# EAGLE board timer (EAGLE 6.5.0)
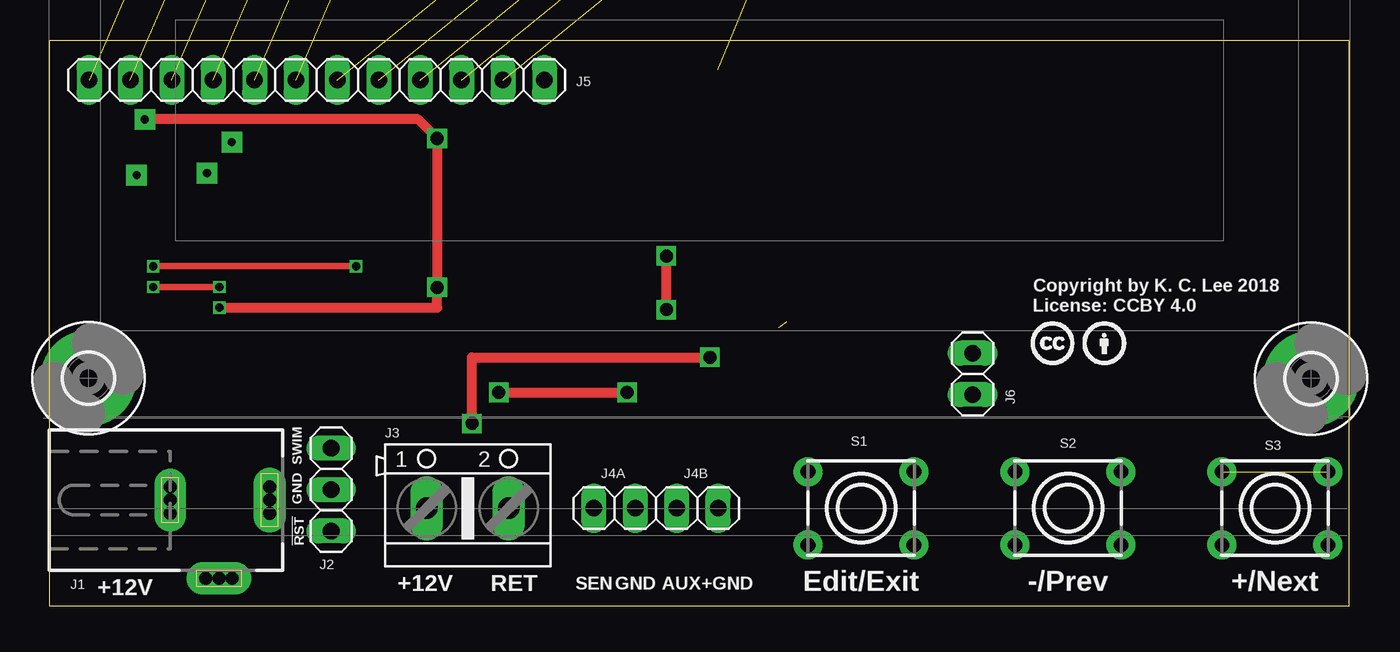
[diagram p0: board, top side]
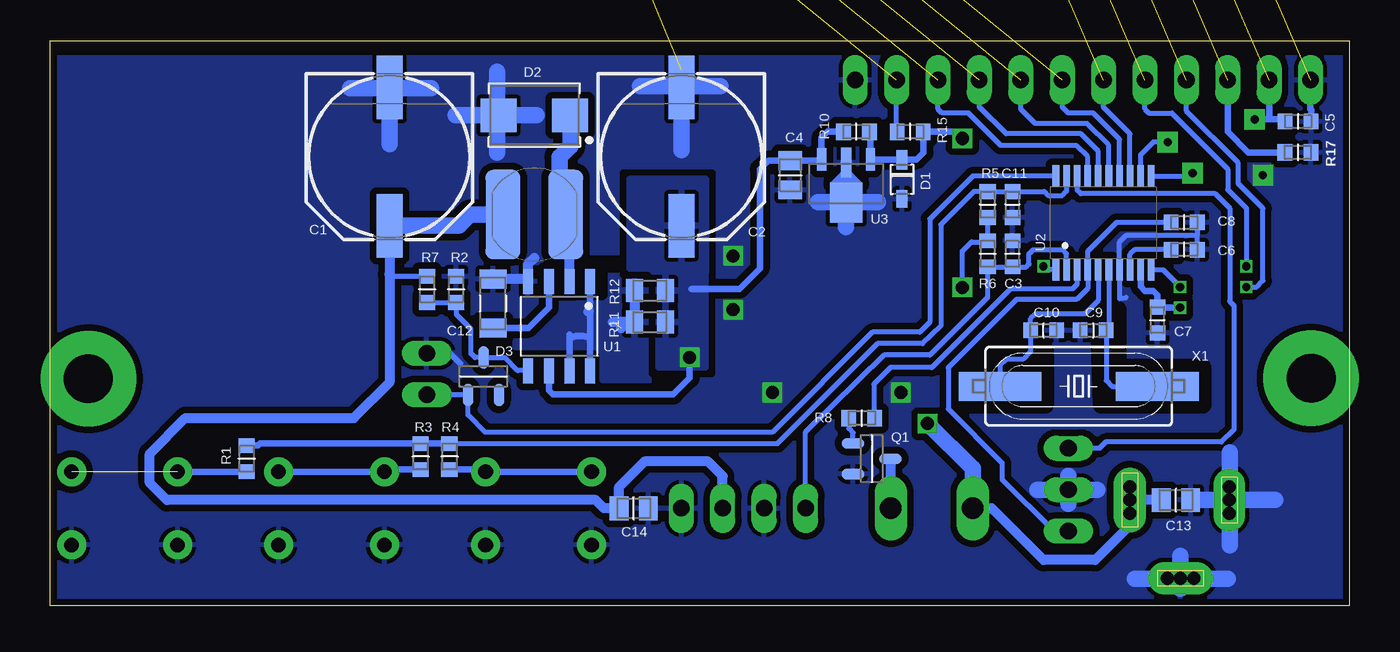
[diagram p1: board, bottom side, seen from below]

Size 79.76 x 34.67 mm. Coordinates in mm from the lower left corner, seen from the top.
Outline: 0,0 79.76,0 79.76,34.67 0,34.67 0,0
Copper layers (1*16): Top 0.035559375mm / dielectric 1.6mm / Bottom 0.035559375mm
Design rules "oshpark-2layer-tented-vias": minimum track width 6mil, minimum drill 10mil, track to track 6mil, track to pad 6mil, pad to pad 6mil, via to via 6mil, smd to smd 6mil, copper to edge 15mil, drill to drill 6mil, minimum pad ring 5mil, minimum via ring 5mil, stop-mask expansion 2.5mil, vias tented up to drill 13mil, thermal gap 10mil
bRestrict: 8 lines

## Footprints (pad centres in the part's own frame; a part is rotated, then mirrored left to right if it is on the bottom)
PANASONIC_G = smd 3.9 x 1.6: + 4.25,0; - -4.25,0
CAPC1608X92N = smd 0.9 x 0.95: 1 -0.8,0; 2 0.8,0
CAPC2012X145AN = smd 1.15 x 1.45: 1 -0.9,0; 2 0.9,0
CAPC3215X168N = smd 1.15 x 1.65: 1 -1.5,0; 2 1.5,0
SOD2514X100N = smd 1.05 x 0.7: A 1.2,0 | smd 1.2 x 0.7: K -1.2,0
DIOM5436X265N = smd 2.2 x 2.05: A 2.2,0; K -2.2,0
SOT95P280X135-3N = smd 1.4 x 0.65: 1 -1.15,0.95; 2 -1.15,-0.95; 3 1.15,0
3,0-PAD = drill 3 pad 5.842: B3,0 0,0
DCJ0202-SLOTTED = drill 0.8 pad 2 long: 1 0,3.1; 2 4.8,0 | drill 0.8: 1A -0.813,3.1; 1B 0.813,3.1; 2A 4.8,-0.813; 2B 4.8,0.813; 3A -0.813,-3; 3B 0.813,-3 | drill 0.8 pad 1.93 long: 3 0,-3
1X03 = drill 1.016 long: 1 -2.54,0; 2 0,0; 3 2.54,0
AK500/2 = drill 1.321 long: 1 -2.515,0; 2 2.515,0
1X02 = drill 1.016 long: 1 -1.27,0; 2 1.27,0
1X12 = drill 1.016 long: 1 -13.97,0; 2 -11.43,0; 3 -8.89,0; 4 -6.35,0; 5 -3.81,0; 6 -1.27,0; 7 1.27,0; 8 3.81,0; 9 6.35,0; 10 8.89,0; 11 11.43,0; 12 13.97,0
CD54 = smd 5.5 x 2.15: 1 0,1.925; 2 0,-1.925
TUXGR_16X2_R2_NM = drill 1 pad 1.676 octagon: 1 -32,15.5; 2 -29.46,15.5; 3 -26.92,15.5; 4 -24.38,15.5; 5 -21.84,15.5; 6 -19.3,15.5; 7 -16.76,15.5; 8 -14.22,15.5; 9 -11.68,15.5; 10 -9.14,15.5; 11 -6.6,15.5; 12 -4.06,15.5; 13 -1.52,15.5; 14 1.02,15.5; 15 3.56,15.5; 16 6.1,15.5
RESC1608X55N = smd 0.9 x 1: 1 -0.8,0; 2 0.8,0
RESC2012X70N = smd 1.05 x 1.4: 1 -0.95,0; 2 0.95,0
MOM_SW = drill 0.9 pad 1.778: 1 -2.25,3.25; 2 2.25,3.25; 3 -2.25,-3.25; 4 2.25,-3.25
SO-8 = smd 1.524 x 0.61: 1 -2.743,1.905; 2 -2.743,0.635; 3 -2.743,-0.635; 4 -2.743,-1.905; 5 2.743,-1.905; 6 2.743,-0.635; 7 2.743,0.635; 8 2.743,1.905
TSSOP20 = smd 0.4 x 1.35: 1 -2.925,-2.875; 2 -2.275,-2.875; 3 -1.625,-2.875; 4 -0.975,-2.875; 5 -0.325,-2.875; 6 0.325,-2.875; 7 0.975,-2.875; 8 1.625,-2.875; 9 2.275,-2.875; 10 2.925,-2.875; 11 2.925,2.875; 12 2.275,2.875; 13 1.625,2.875; 14 0.975,2.875; 15 0.325,2.875; 16 -0.325,2.875; 17 -0.975,2.875; 18 -1.625,2.875; 19 -2.275,2.875; 20 -2.925,2.875
SOT89 = smd 0.57 x 1.4: 1 -1.5,-1.475; 3 1.5,-1.475 | smd 0.65 x 1.8: 2 0,-1.275 | smd 2 x 2.45: 4 0,1.175
SM49 = smd 5.08 x 1.778: 1 -4.826,0; 2 4.826,0

## Placement (x,y rotation side)
C1  220uF  [PANASONIC_G]  58.93,27.56 270 bottom
C2  220uF  [PANASONIC_G]  41.02,27.56 270 bottom
C3  0.1uF  [CAPC1608X92N]  20.7,21.59 270 bottom
C4  0u1  [CAPC2012X145AN]  34.34,26.42 90 bottom
C5  0.1uF  [CAPC1608X92N]  3.17,29.72 180 bottom
C6  1uF  [CAPC1608X92N]  10.16,21.84 180 bottom
C7  1uF  [CAPC1608X92N]  11.81,17.53 90 bottom
C8  0.1uF  [CAPC1608X92N]  10.16,23.52 180 bottom
C9  22pF  [CAPC1608X92N]  15.75,16.89 0 bottom
C10  22pF  [CAPC1608X92N]  18.8,16.89 180 bottom
C11  0.1uF  [CAPC1608X92N]  20.7,24.61 90 bottom
C12  120pF  [CAPC3215X168N]  52.58,18.54 270 bottom
C13  0u1  [CAPC2012X145AN]  10.67,6.48 180 bottom
C14  0.1uF  [CAPC2012X145AN]  43.94,5.97 180 bottom
D1  5.1V  [SOD2514X100N]  27.48,26.16 270 bottom
D2  MBRS130  [DIOM5436X265N]  50.04,30.1 180 bottom
D3  BAV99  [SOT95P280X135-3N]  53.16,14.07 90 bottom
H1  MOUNT-PAD-ROUND3.0  [3,0-PAD]  2.37,13.96 0 top
H2  MOUNT-PAD-ROUND3.0  [3,0-PAD]  77.4,13.93 0 top
J1  DCJ0202  [DCJ0202-SLOTTED]  10.39,6.48 270 top
J2  [1X03]  17.27,7.11 90 top
J3  [AK500/2]  25.65,5.97 0 top
J4A  [1X02]  34.67,5.97 0 top
J4B  [1X02]  39.75,5.97 0 top
J5  [1X12]  16.38,32.26 180 top
J6  [1X02]  56.64,14.22 90 top
L1  CD54-100uH  [CD54]  50.04,24 270 bottom
LCD1  1602  [TUXGR_16X2_R2_NM]  39.88,29.46 0 top  (outside the outline)
LICENSE1  CC-BY100%  [CC-BY-100]  60.2,14.73 0 top
Q1  AO3400  [SOT95P280X135-3N]  29.34,9.02 0 bottom
R1  4K7  [RESC1608X55N]  67.69,9.02 270 bottom
R2  10K  [RESC1608X55N]  54.84,19.41 270 bottom
R3  10K  [RESC1608X55N]  57.02,9.14 270 bottom
R4  20K  [RESC1608X55N]  55.24,9.14 270 bottom
R5  20K  [RESC1608X55N]  22.23,24.61 90 bottom
R6  10K  [RESC1608X55N]  22.23,21.59 270 bottom
R7  10K  [RESC1608X55N]  56.62,19.41 270 bottom
R8  330R  [RESC1608X55N]  29.95,11.51 180 bottom
R10  470R  [RESC1608X55N]  30.28,29.08 180 bottom
R11  1R  [RESC2012X70N]  42.95,17.4 180 bottom
R12  1R  [RESC2012X70N]  42.95,19.33 180 bottom
R15  2K2  [RESC1608X55N]  26.97,29.08 180 bottom
R17  2K2  [RESC1608X55N]  3.19,27.81 0 bottom
S1  [MOM_SW]  49.78,5.97 270 top
S2  [MOM_SW]  62.48,5.97 270 top
S3  [MOM_SW]  75.18,5.97 270 top
U1  MC34063D  [SO-8]  48.51,17.14 270 bottom
U2  STM8SX03F3  [TSSOP20]  15.11,23.5 0 bottom
U3  NC-78LACU05  [SOT89]  30.91,25.91 180 bottom
X1  12MHz  [SM49]  16.64,13.46 180 bottom

## Library data of the parts
C1 C2 S1-S3 = Misc Passives
C3-C14 = ipc-7351-capacitor
D1-D3 = ipc-7351-diode
H1 H2 = holes
J1 = Misc Conn
J2 J4A J4B J5 J6 = pinhead-1
J3 = con-ptr500
L1 = Misc Inductors
LCD1 = Misc opto; OC_FARNELL: unknown; OC_NEWARK: unknown
LICENSE1 = Misc logo
Q1 = ipc-7351-transistor
R1-R8 R10-R12 R15 R17 = ipc-7351-resistor
U1 U3 = Misc Power
U2 = Misc Processor
X1 = crystal; OC_FARNELL: unknown; OC_NEWARK: unknown

## Nets
!EN: D3.1 J6.1 U2.20
!RST: C8.2 J2.1 U2.4
+5V: C5.2 C7.2 D1.K J5.11 LCD1.2 R5.1 R6.1 R10.1 R15.1 U2.9 U3.1
+VOUT: C1.+ C14.2 J4B.1 L1.2 R7.1
GND: C1.- C2.- C3.1 C4.1 C5.1 C6.1 C7.1 C8.1 C9.1 C10.1 C11.1 C12.1 C13.1 C14.1 D1.A D2.A J1.2 J1.3 J2.2 J4A.2 J4B.2 J5.1 J5.12 J6.2 LCD1.1 LCD1.16 Q1.2 R2.1 R17.2 S1.2 S1.4 S2.2 S2.4 S3.2 S3.4 U1.4 U2.7 U3.2 U3.4
KEYS: C11.2 R1.1 R3.1 R4.1 R5.2 U2.19
LCD_A: J5.2 LCD1.15 R15.2
LCD_D4: J5.6 LCD1.11 U2.14
LCD_D5: J5.5 LCD1.12 U2.15
LCD_D6: J5.4 LCD1.13 U2.16
LCD_D7: J5.3 LCD1.14 U2.17
LCD_E: J5.7 LCD1.6 U2.13
LCD_RS: J5.9 LCD1.4 U2.10
LCD_RW: J5.8 LCD1.5 U2.1
N$1: J3.2 Q1.3
N$2: C6.2 U2.8
N$3: D3.3 R2.2 R7.2 U1.5
N$4: C10.2 U2.5 X1.2
N$5: C9.2 U2.6 X1.1
N$6: R11.2 R12.2 U1.1 U1.7 U1.8
N$7: D2.K L1.1 U1.2
N$8: C12.2 U1.3
N$9: R4.2 S1.1 S1.3
N$16: Q1.1 R8.2
N$17: R8.1 U2.3
N$18: R3.2 S2.1 S2.3
N$19: R1.2 S3.1 S3.3
N$27: J5.10 LCD1.3 R17.1
SCL: U2.12
SDA: U2.11
SENSE: C3.2 J4A.1 R6.2 U2.2
SWIM: J2.3 U2.18
VCC: C2.+ C4.2 C13.2 J1.1 J3.1 R10.2 R11.1 R12.1 U1.6 U3.3

## Tracks (layer width: path | path; a pad name or v marks a point on that pad's centre or on a via)
!EN
  Bottom 0.305: U2.20 23.14,26.37 25.78,23.72 25.78,17.4 26.39,16.79 29.29,16.79 35.43,10.64 53.03,10.64 54.11,11.72 | 54.11,11.68 54.11,11.72 | 54.11,11.72 D3.1 54.15,12.95 J6.1
!RST
  Bottom 0.305: C8.2 14.33,23.52 16.09,21.76 U2.4 16.09,19.47 16.76,18.8 20.45,18.8 24.64,14.61 24.64,12.06 21.34,8.76 21.34,7.75 18.16,4.57 J2.1
+5V  (via drill 0.5, 0.5 pad 1.27, 0.8)  (1 unrouted)
  Top 0.61: v5.84,29.84 22.61,29.84 v23.77,28.68 v23.77,19.53 23.77,18.29 v10.41,18.29
  Bottom 0.305: R5.1 R6.1 22.29,22.33 23.22,22.33 23.77,21.77 v23.77,19.53
  Bottom 0.406: J5.11 4.95,29.84 | 4.95,29.84 3.85,29.84 C5.2 | v10.41,18.29 11.77,18.29 C7.2 11.81,19.05 12.06,19.3 12.57,19.3 12.84,19.57 U2.9 | v5.84,29.84 4.95,29.84 | 27.5,27.38 U3.1 29.41,29.02 R10.1 | 27.5,27.38 D1.K | 27.5,27.38 26.59,27.38 26.16,27.81 26.16,29.05 R15.1 24.18,29.08 v23.77,28.68
+VOUT
  Bottom 0.305: R7.1 58.81,20.21 58.93,20.32
  Bottom 0.61: J4B.1 38.48,7.95 39.37,8.84 43.28,8.84 44.83,7.29 C14.2 45.77,5.97 46.28,6.48 72.59,6.48 73.64,7.52 73.64,9.32 71.45,11.51 61.11,11.51 58.93,13.69 58.93,20.32 C1.+ 58.93,22.23 58.8,22.1
  Bottom 1.016: L1.2 53.98,24 54.67,23.31 C1.+
GND  (via drill 0.5 pad 1.27, 0.8)  (2 unrouted)
  Top 0.61: v37.85,18.16 v37.85,21.46 | v27.56,13.08 v35.43,13.08
  Bottom 0.305: C8.1 9.36,22.73 | 9.36,22.73 13.72,22.73 14.14,22.31 U2.7 14.14,18.84 13.72,18.92 | C6.1 9.36,22.73
  Bottom 0.406: C5.1 2.38,30.44 2.41,30.48 J5.12 | U3.4 30.91,26.16 U3.2 | J6.2 55.24,15.49 54.61,14.86
  Bottom 0.61: U1.4 50.42,20.95 50.04,21.34 | 51.69,20.07 50.55,20.07
  Bottom 1.016: 7.37,9.4 7.37,3.68 | 4.57,6.48 9.53,6.48 | 7.49,1.65 13.21,1.65 | 10.41,3.05 10.41,1.02 | 15.49,7.11 19.18,7.11 | 17.27,6.25 17.27,7.95 | 38.61,31.88 43.56,31.88 | 41.02,27.94 41.02,32.89 | 61.34,31.75 56.39,31.75 | 58.93,33.27 58.93,28.32 | 52.32,32.77 52.32,27.81 | 49.91,30.1 54.86,30.1 | 28.96,24.77 32.64,24.77 | 30.91,23.24 30.91,26.16
  other vias: 5.33,26.42
  pour Bottom (isolate 0.406, rank 6): 0,0 79.63,0 79.63,33.66 0.25,33.66
KEYS
  Bottom 0.305: R4.1 35.12,9.94 28.98,16.08 26.21,16.08 25.09,17.17 25.09,23.39 23.08,25.41 R5.2 C11.2 18.76,25.41 18.52,25.17 17.65,25.17 17.39,25.44 U2.19
  Bottom 0.406: R4.1 R3.1 66.85,9.94 66.98,9.82 R1.1
LCD_A  (1 unrouted)
  Bottom 0.305: R15.2 27.79,29.18 27.81,29.21 J5.2
LCD_D4  (1 unrouted)
  Bottom 0.305: U2.14 14.14,28.62 15.75,30.23 17.27,30.23 17.65,30.61 J5.6
LCD_D5  (1 unrouted)
  Bottom 0.305: U2.15 14.79,28.25 16.13,29.59 19.3,29.59 20.19,30.48 J5.5
LCD_D6  (1 unrouted)
  Bottom 0.305: U2.16 15.44,27.88 16.51,28.96 21.08,28.96 22.73,30.61 J5.4
LCD_D7  (1 unrouted)
  Bottom 0.305: U2.17 16.09,27.54 16.79,28.25 21.41,28.25 23.39,30.23 25.02,30.23 25.27,30.48 J5.3
LCD_E  (1 unrouted)
  Bottom 0.305: U2.13 13.49,28.96 15.11,30.58 J5.7
LCD_RS  (via drill 0.5)  (1 unrouted)
  Top 0.406: v10.41,19.56 v6.35,19.56
  Bottom 0.305: U2.10 11.47,20.62 v10.41,19.56 | v6.35,19.56 5.71,19.56 5.33,19.94 5.33,24.38 6.86,25.91 6.86,27.18 10.03,30.35 J5.9
LCD_RW  (via drill 0.5)  (1 unrouted)
  Top 0.406: v6.35,20.83 v18.8,20.83
  Bottom 0.305: v6.35,20.83 6.35,24.38 7.49,25.53 7.49,26.8 10.92,30.23 12.32,30.23 12.57,30.48 J5.8 | U2.1 18.59,20.62 v18.8,20.83
N$1
  Bottom 0.61: Q1.3 28.19,5.99 J3.2
N$2
  Bottom 0.305: C6.2 13.21,21.84 13.49,21.56 U2.8
N$3
  Bottom 0.305: U1.5 50.44,14.43 51.05,14.43 51.85,15.22 D3.3 53.68,15.22 53.95,15.49 53.95,16.99 54.84,17.88 R2.2 R7.2
N$4
  Bottom 0.305: U2.5 15.44,18.73 16.26,17.91 19.3,17.91 19.6,17.61 C10.2 19.6,15.58 20.07,15.11 21.08,15.11 21.46,14.73 X1.2
N$5
  Bottom 0.305: U2.6 14.79,17.05 C9.2 14.95,13.8 14.61,13.46 X1.1 11.9,13.55
N$6  (1 unrouted)
  Bottom 0.406: U1.8 46.61,16.38 | 46.61,16.38 U1.1 | U1.7 47.88,16.38 | 47.88,16.38 47.88,16.64 | 47.88,16.38 arc60 46.61,16.38
  Bottom 0.61: 44.73,17.04 44.7,17.02 | R12.2 R11.2 45.21,17.4 | 46.7,18.07 46.74,18.03
  pour Bottom (isolate 0.406, rank 2): 42.8,20.7 45.34,20.7 45.34,18.92 45.72,18.54 45.85,18.54 51.18,18.67 51.18,15.88 46.23,15.88 45.85,15.49 45.85,13.84 42.93,13.84
N$7
  Bottom 0.61: U1.2 47.88,23.89 48.5,24.51
  Bottom 1.016: D2.K 47.83,28.19 48.5,27.53 48.5,24.51 L1.1
N$8
  Bottom 0.406: U1.3 49.15,18.29 50.4,17.04 C12.2
N$9
  Bottom 0.406: S1.3 S1.1 53.16,8.34 R4.2
N$16
  Bottom 0.305: R8.2 30.75,10.86 30.49,10.6 Q1.1
N$17
  Bottom 0.305: U2.3 16.74,19.71 17.02,19.43 20.83,19.43 25.65,14.61 28.19,14.61 29.21,13.59 29.21,11.56 R8.1
N$18
  Bottom 0.406: S2.3 S2.1 | 59.16,8.29 S2.3 | R3.2 59.11,8.34 S2.3
N$19  (1 unrouted)
  Bottom 0.406: R1.2 S3.3
N$27  (1 unrouted)
  Bottom 0.406: R17.1 6.22,27.81 7.49,29.08 J5.10
SCL  (via drill 0.5 pad 1.27)
  Bottom 0.305: U2.12 12.84,27.68 12.06,28.45 v11.18,28.45
SDA  (via drill 0.5 pad 1.27)
  Bottom 0.305: U2.11 10.21,26.37 v9.65,26.54
SENSE
  Bottom 0.305: U2.2 17.39,21.58 17.65,21.84 19.43,21.84 19.68,21.59 19.68,20.95 19.85,20.79 C3.2 R6.2 22.23,18.92 25.78,15.37 28.57,15.37 33.4,10.67 J4A.1
SWIM
  Bottom 0.305: U2.18 16.74,25.5 16.51,25.27 8.26,25.27 7.37,24.38 7.37,18.67 7.11,18.41 7.11,10.79 7.87,10.03 14.99,10.03 15.37,9.65 J2.3
VCC  (via drill 0.8)
  Top 0.61: v25.91,11.18 25.91,15.24 v40.51,15.24
  Bottom 0.406: R10.2 32.05,29.08 32.41,28.73 U3.3 32.48,27.32 C4.2 35.68,27.32 36.2,26.8 36.2,20.7 37.47,19.43 40.39,19.43 | 41.15,23.82 41.17,23.79 | U1.6 49.15,13.21 48.9,12.95 41.53,12.95 40.51,13.97 v40.51,15.24
  Bottom 0.61: J3.1 21.97,5.97 18.8,2.79 15.62,2.79 13.49,4.93 J1.1 C13.2
  Bottom 1.016: J3.1 23.14,8.41 v25.91,11.18 | 41.17,23.79 C2.+
  pour Bottom (isolate 0.406): 39.55,14.61 42.42,14.61 42.42,20.19 42.93,20.7 44.2,20.7 44.2,26.16 39.5,26.16

## Text on the board
tPlace: Copyright by K. C. Lee 2018 / License: CCBY 4.0 | SWIM | GND | !RST | SEN | GND | AUX+ | GND | +12V | +12V | RET | Edit/Exit | -/Prev | +/Next